# Altium PCB P10_ATMEGA328P.PcbDoc
Units mm, origin at the board's own origin, x right, y up, seen from the top; angles counter-clockwise.
Board outline 90.17 x 41.15 mm, 2 copper layers (Top Layer, Bottom Layer); 54 components, 46 nets, 163 pads, 38 vias.
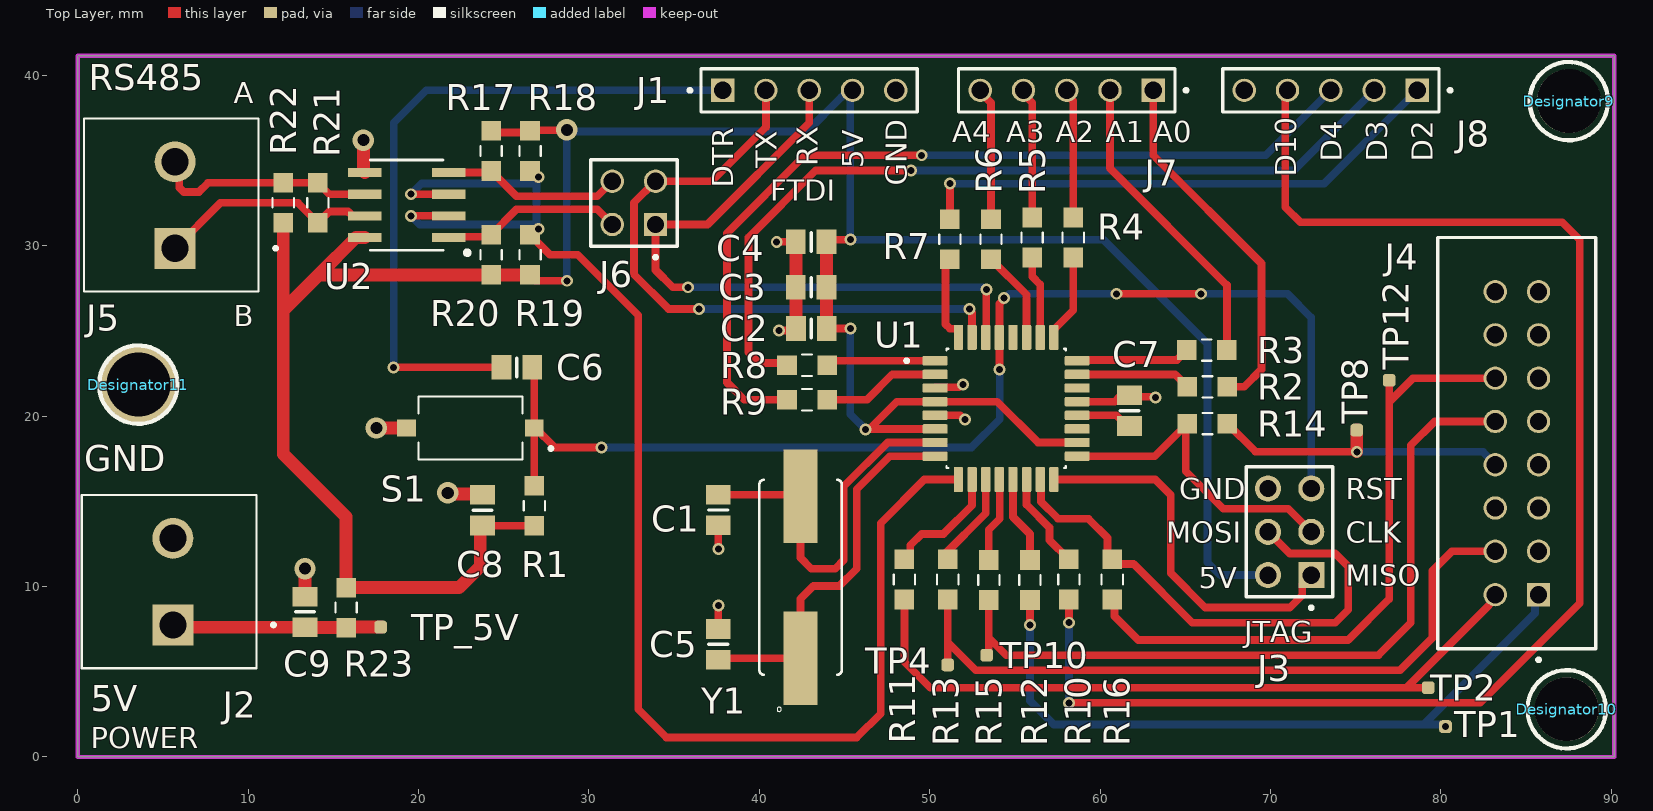
[diagram p0: Top Layer view]
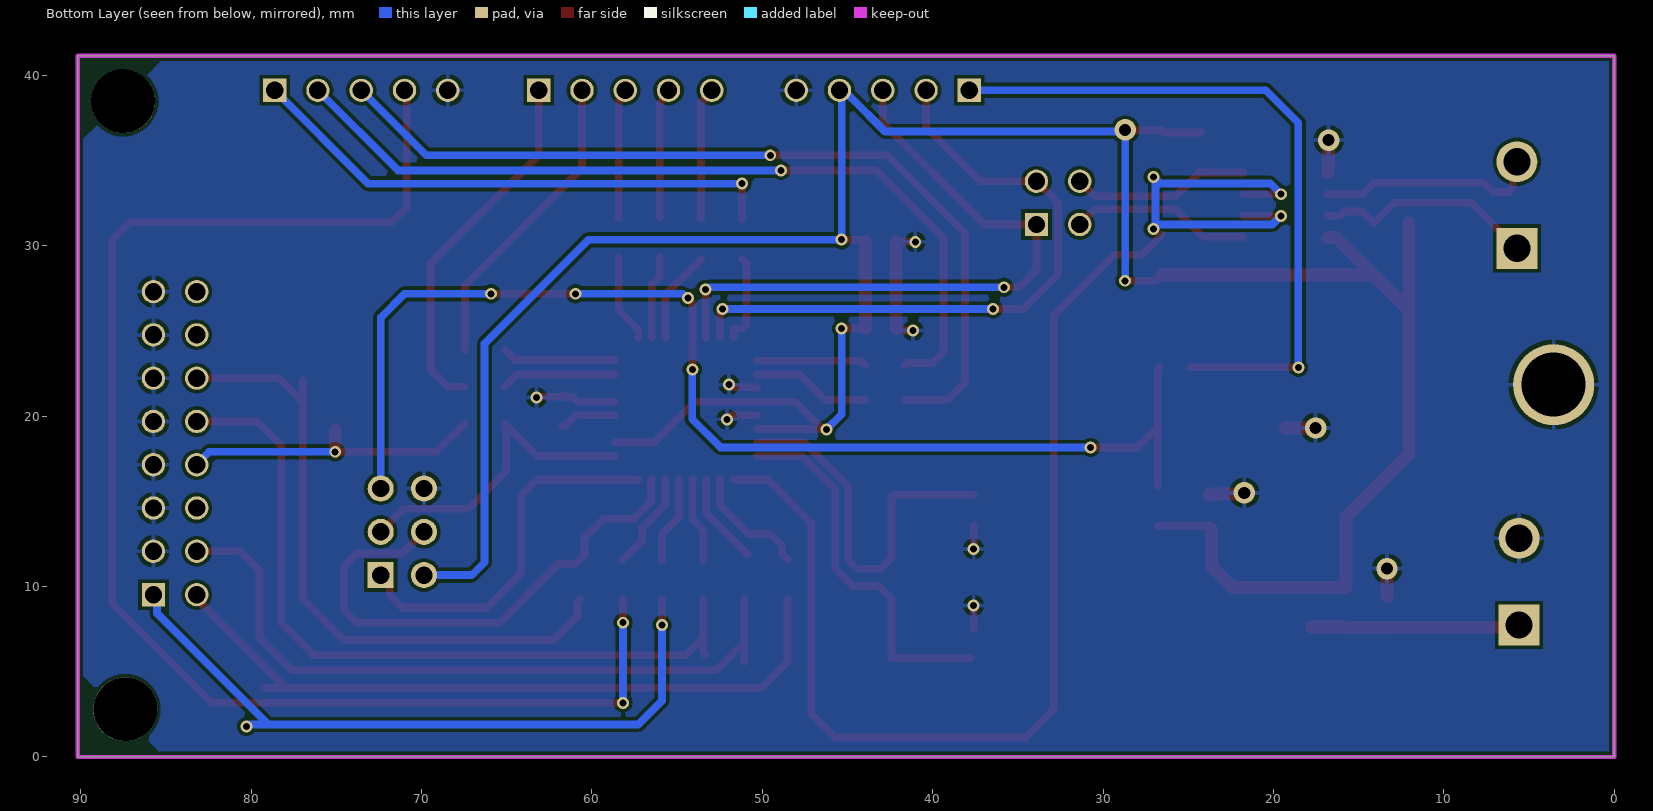
[diagram p1: Bottom Layer view, seen from below]
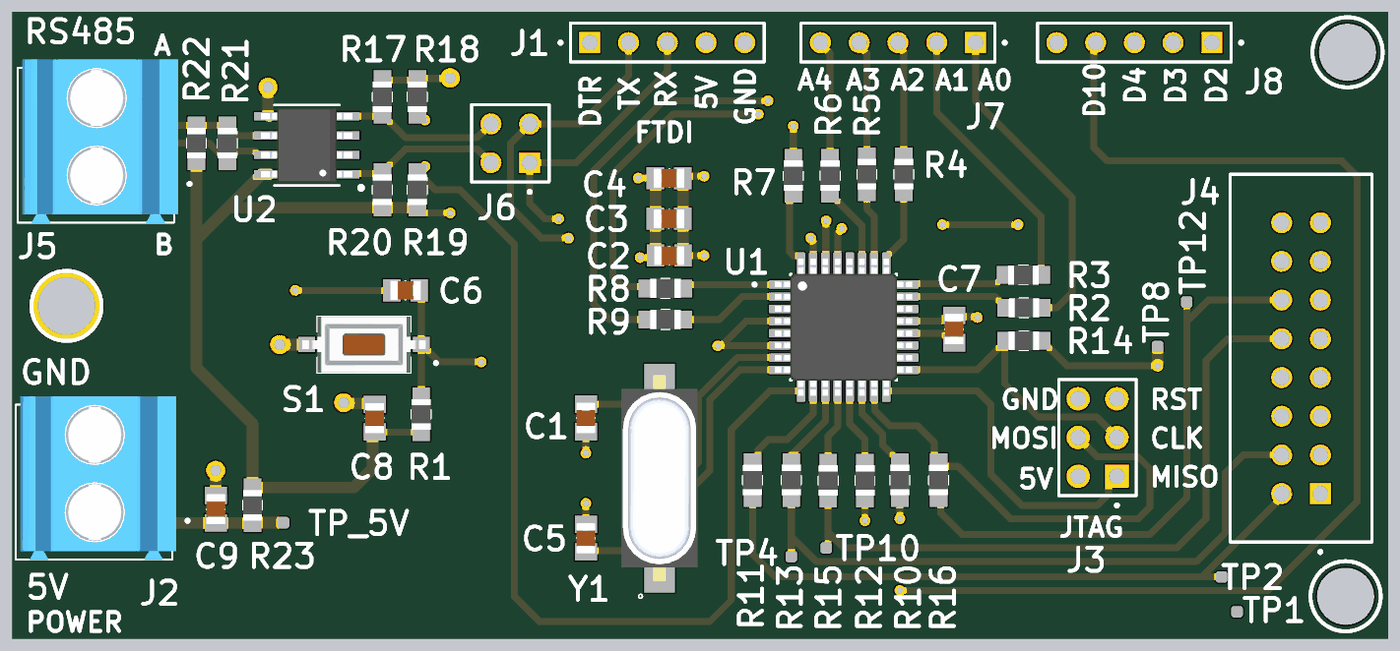
[diagram p2: 3D render of the assembled board from above, using the file's embedded part models]

## Layer stack, top to bottom
Top Solder: solder mask 0.0102, Solder Resist, Dk 3.5
Top Layer: signal copper 0.0356
Dielectric 1: dielectric 0.32, FR-4, Dk 4.8
Bottom Layer: signal copper 0.0356
Bottom Solder: solder mask 0.0102, Solder Resist, Dk 3.5

## Board outline
0,0 0,41.148 90.17,41.148 90.17,0

## Design rules (kind name [scope] priority, off if disabled: settings)
Clearance [All] p1: gap=0.2 ignorepadtopadclearanceinfootprint=FALSE
HoleSize [All] p1: absolutevalues=TRUE maxlimit=4.54 minlimit=0.25 maxpercent=80.000 minpercent=20.000
MinimumSolderMaskSliver [All] p1: minsoldermaskwidth=0.042
PlaneConnect [All] p1: planeconnectstyle=Relief reliefexpansion=0.508 reliefentries=4 reliefconductorwidth=0.354 reliefairgap=0.254
PolygonConnect [All] p1: connectstyle=Relief reliefconductorwidth=0.254 reliefentries=4 polygonreliefangle="90 Angle" airgapwidth=0.254
RoutingVias [All] p1: holewidth=0.411 width=0.8 viastyle="Through Hole" minholewidth=0.311 minwidth=0.6 maxholewidth=3.711 maxwidth=5.27
SilkToSolderMaskClearance [IsPad] p1: minsilkscreentomaskgap=0 clearancetoexposedcopper=TRUE
SolderMaskExpansion [All] p1: expansion=0.102 istentingtop=FALSE
SupplyNets "Schematic Supply Nets_1" [InNet('+5')] p1: voltage=0.000
SupplyNets "Schematic Supply Nets" [InNet('GND')] p2: voltage=0.000
UnpouredPolygon [All] p1: allowshelved=TRUE
Width [All] p1: maxlimit=0.754 minlimit=0.3 preferedwidth=0.454
25 further rules are at their usual default settings.

## Classes and differential pairs
component class P10_ATMEGA328P1: J4 J5 J6 R11 R12 R13 R14 R15 R16 R17 R18 R19 R20 R21 R22 U2
component class P10_ATMEGA328P: C1 C2 C3 C4 C5 C6 C7 C8 C9 J1 J2 J3 J7 J8 R1 R2 R3 R4 R5 R6 R7 R8 R9 R10 S1 U1 Y1

## Components (designator, comment, footprint, x,y, rotation, side; value= is the part's Value field where it differs from the comment)
C1 "CAP CER 22pF/50V 5% 0805" "CAP CER 0.1uF/50V 5%" 37.592,14.489 r90 top
C2 "CAP CER 0.1uF/50V 5% 0805" "CAP CER 0.1uF/50V 5%" 43.053,25.146 r0 top
C3 "CAP CER 0.1uF/50V 5% 0805" "CAP CER 0.1uF/50V 5%" 43.042,27.559 r0 top
C4 "CAP CER 0.1uF/50V 5% 0805" "CAP CER 0.1uF/50V 5%" 43.042,30.226 r0 top
C5 "CAP CER 22pF/50V 5% 0805" "CAP CER 0.1uF/50V 5%" 37.592,6.604 r270 top
C6 "CAP CER 0.1uF/50V 5% 0805" "CAP CER 0.1uF/50V 5%" 25.77,22.86 r180 top
C7 "CAP CER 0.1uF/50V 5% 0805" "CAP CER 0.1uF/50V 5%" 61.722,20.32 r270 top
C8 "CAP CER 0.1uF/50V 5% 0805" "CAP CER 0.1uF/50V 5%" 23.749,14.478 r270 top
C9 "CAP CER 10uF/50V 5% 0805" "CAP CER 0.1uF/50V 5%" 13.335,8.509 r270 top
Designator9 "Comment" "ScrewHole_3.75mmD - duplicate"#1 87.503,38.481 r0 top
Designator10 "Comment" "ScrewHole_3.75mmD - duplicate"#1 87.376,2.794 r0 top
Designator11 "Comment" "ScrewHole_3.75mmD - duplicate"#2 3.556,21.844 r0 top
J1 "BURGE 5 PIN 2.54mm" "BURGE 5 PIN" 42.926,39.116 r180 top
J2 "2 PIN Terminal Block Connector 5.08 mm" "2 PIN Terminal Block Connector 5.08 mm" 5.588,7.747 r90 top
J3 "BURGE 6 PIN 3X2" "BURGE 6 PIN 3X2" 71.12,13.208 r90 top
J4 "BOX HEADER MALE 8X2 2.54mm" "BOX HEADER MALE 8X2 2.54mm" 85.725,9.525 r90 top
J5 "2 PIN Terminal Block Connector 5.08 mm" "2 PIN Terminal Block Connector 5.08 mm" 5.715,29.845 r90 top
J6 "BURGE 2X2 PIN" "BURGE 2X2 pin" 33.909,31.242 r90 top
J7 "BURGE 5 PIN 2.54mm" "BURGE 5 PIN" 58.039,39.116 r0 top
J8 "BURGE 5 PIN 2.54mm" "BURGE 5 PIN" 73.533,39.116 r0 top
R1 "RES 0805 10K/0.25W 5%" "RES 0805 10K/0.25W 5%" 26.797,14.732 r90 top
R2 "RES 0805 0E/0.25W 5%" "RES 0805 10K/0.25W 5%" 66.294,21.717 r0 top
R3 "RES 0805 0E/0.25W 5%" "RES 0805 10K/0.25W 5%" 66.262,23.876 r0 top
R4 "RES 0805 0E/0.25W 5%" "RES 0805 10K/0.25W 5%" 58.42,30.48 r90 top
R5 "RES 0805 0E/0.25W 5%" "RES 0805 10K/0.25W 5%" 56.007,30.48 r90 top
R6 "RES 0805 0E/0.25W 5%" "RES 0805 10K/0.25W 5%" 53.594,30.385 r90 top
R7 "RES 0805 0E/0.25W 5%" "RES 0805 10K/0.25W 5%" 51.181,30.385 r90 top
R8 "RES 0805 0E/0.25W 5%" "RES 0805 10K/0.25W 5%" 42.799,22.987 r180 top
R9 "RES 0805 0E/0.25W 5%" "RES 0805 10K/0.25W 5%" 42.799,20.955 r180 top
R10 "RES 0805 0E/0.25W 5%" "RES 0805 10K/0.25W 5%" 58.166,10.414 r270 top
R11 "RES 0805 0E/0.25W 5%" "RES 0805 10K/0.25W 5%" 48.514,10.414 r90 top
R12 "RES 0805 0E/0.25W 5%" "RES 0805 10K/0.25W 5%" 55.88,10.382 r270 top
R13 "RES 0805 0E/0.25W 5%" "RES 0805 10K/0.25W 5%" 51.054,10.414 r90 top
R14 "RES 0805 0E/0.25W 5%" "RES 0805 10K/0.25W 5%" 66.294,19.558 r180 top
R15 "RES 0805 0E/0.25W 5%" "RES 0805 10K/0.25W 5%" 53.467,10.382 r90 top
R16 "RES 0805 0E/0.25W 5%" "RES 0805 10K/0.25W 5%" 60.706,10.414 r90 top
R17 "RES 0805 10K/0.25W 5%" "RES 0805 10K/0.25W 5%" 24.257,35.56 r90 top
R18 "RES 0805 10K/0.25W 5%" "RES 0805 10K/0.25W 5%" 26.543,35.56 r90 top
R19 "RES 0805 10K/0.25W 5%" "RES 0805 10K/0.25W 5%" 26.543,29.464 r270 top
R20 "RES 0805 10K/0.25W 5%" "RES 0805 10K/0.25W 5%" 24.257,29.464 r270 top
R21 "RES 0805 120E/0.25W 5%" "RES 0805 10K/0.25W 5%" 14.097,32.512 r90 top
R22 "RES 0805 20K/0.25W 5%" "RES 0805 10K/0.25W 5%" 12.065,32.512 r90 top
R23 "RES 0805 10K/0.25W 5%" "RES 0805 10K/0.25W 5%" 15.748,8.763 r270 top (schematic designator R1)
S1 "PUSHBUTTON_SMD_6.1 x 3.7 mm, 2.5 mm" "PUSHBUTTON_SMD_6.1 x 3.7 mm, 2.5 mm" 23.047,19.304 r180 top
TP1 "Comment" "Touch Points 1mm" 80.264,1.778 r0 top
TP2 "Comment" "Touch Points 1mm" 79.248,4.064 r0 top
TP4 "Comment" "Touch Points 1mm" 51.054,5.397 r0 top
TP8 "Comment" "Touch Points 1mm" 75.057,19.177 r0 top
TP10 "Comment" "Touch Points 1mm" 53.34,5.969 r0 top
TP12 "Comment" "Touch Points 1mm" 76.962,22.098 r0 top
TP_5V "Comment" "Touch Points 1mm" 17.78,7.62 r0 top
U1 "ATMEGA328P-AU TQFP-32" "ATMEGA328P-AU IC" 54.483,20.447 r0 top
U2 "MAX485CSA SOIC-8" MAX485CSA 19.304,32.385 r180 top
Y1 "Crystal 16 Mhz SMD 2 pin" "Crystal 16 Mhz SMD 2 pin" 42.418,10.541 r90 top

## Footprints (in the part's own frame and the unit in brackets; to place one, negate y for a bottom-side part, rotate by r counter-clockwise, add the part's x,y. Pads: shape width x height; smd on the part's side, far side on the other; paste and mask are expansions set on the pad)
"2 PIN Terminal Block Connector 5.08 mm" [mm]
  rect 2.4x2.4 / inner round 2.4 / far side rect 2.4x2.4 hole 1.6: 1(0,0)
  round 2.4 hole 1.6: 2(5.08,0)
  silkscreen extent -2.54,-6 7.62,5.35, body extent -2.59,-5.17 8.17,5.08, height 14
"ATMEGA328P-AU IC" [mm] "AVR ATMEGA328P-AU IC 8-Bit 20MHz 32KB (16K x 16) FLASH 32-TQFP (7x7)"
  rrect25% 1.47x0.55 smd: 1(-4.17,2.8) 2(-4.17,2) 3(-4.17,1.2) 4(-4.17,0.4) 5(-4.17,-0.4) 6(-4.17,-1.2) 7(-4.17,-2) 8(-4.17,-2.8) 17(4.17,-2.8) 18(4.17,-2) 19(4.17,-1.2) 20(4.17,-0.4) 21(4.17,0.4) 22(4.17,1.2) 23(4.17,2) 24(4.17,2.8)
  rrect25% 0.55x1.47 smd: 9(-2.8,-4.17) 10(-2,-4.17) 11(-1.2,-4.17) 12(-0.4,-4.17) 13(0.4,-4.17) 14(1.2,-4.17) 15(2,-4.17) 16(2.8,-4.17) 25(2.8,4.17) 26(2,4.17) 27(1.2,4.17) 28(0.4,4.17) 29(-0.4,4.17) 30(-1.2,4.17) 31(-2,4.17) 32(-2.8,4.17)
  silkscreen extent -5.94,-3.5 3.5,3.5, body extent -4.5,-4.5 4.5,4.5, height 1.2
"BOX HEADER MALE 8X2 2.54mm" [mm] "BOX HEADER MALE 8X2 2.54mm 16 pin"
  rect 1.37x1.37 hole 1.02: 01(0,0)
  round 1.37 hole 1.02: 02(0,2.54) 03(2.54,0) 04(2.54,2.54) 05(5.08,0) 06(5.08,2.54) 07(7.62,0) 08(7.62,2.54) 09(10.16,0) 10(10.16,2.54) 11(12.7,0) 12(12.7,2.54) 13(15.24,0) 14(15.24,2.54) 15(17.78,0) 16(17.78,2.54)
  silkscreen extent -3.92,-3.36 20.95,5.9
"BURGE 2X2 pin" [mm] "Connector Header Through Hole 4 position 0.100 (2.54mm), 4X2 PIN"
  rect 1.37x1.37 hole 1.02: 01(0,0)
  round 1.37 hole 1.02: 02(0,2.54) 03(2.54,0) 04(2.54,2.54)
  silkscreen extent -2.02,-1.27 3.81,3.81
"BURGE 5 PIN" [mm] "MTSW-105-07-T-S-048 BURGE 5 PIN 2.54mm"
  rect 1.37x1.37 hole 1.02: 01(5.08,0)
  round 1.37 hole 1.02: 02(2.54,0) 03(0,0) 04(-2.54,0) 05(-5.08,0)
  silkscreen extent -6.35,-1.27 7.1,1.27
"BURGE 6 PIN 3X2" [mm] "MTSW-103-X-X-D-X BURGE 6 PIN 3X2 2.54MM"
  rect 1.53x1.53 / inner round 1.53 / far side rect 1.53x1.53 hole 1.02: 01(-2.54,-1.27)
  round 1.53 hole 1.02: 02(-2.54,1.27) 03(0,-1.27) 04(0,1.27) 05(2.54,-1.27) 06(2.54,1.27)
  silkscreen extent -4.56,-2.54 3.81,2.54
"CAP CER 0.1uF/50V 5%" [mm]
  rect 1.15x1.45 smd: 1(-0.9,0) 2(0.9,0)
  silkscreen extent 0,-0.55 0,0.55, body extent -1,-0.63 1,0.63, height 1.35
"Crystal 16 Mhz SMD 2 pin" [mm] "16 MHz Â±30ppm Crystal 20pF 60 Ohms HC-49/US FOXSDLF/128-20"
  rect 5.5x2 smd: 1(-4.75,0) 2(4.75,0)
  silkscreen extent -7.88,-2.41 5.71,2.41, body extent -6.75,-2.5 6.75,2.5, height 4.5
MAX485CSA [mil] "MAX485CSA-RS-485/RS-422 Transceivers, SOIC-8"
  rect 78x21 smd: 1(-97,75) 2(-97,25) 3(-97,-25) 4(-97,-75) 5(97,-75) 6(97,-25) 7(97,25) 8(97,75)
  silkscreen extent -145,-104 84,115, body extent -118,-96 118,96, height 69
"PUSHBUTTON_SMD_6.1 x 3.7 mm, 2.5 mm" [mm] "6.1 x 3.7 mm, 2.5 mm Actuator Height, 260 gf, Red, Surface Mount, SPST, Tactile Switch, TS09-63-25-R-260-SMT-TR"
  rect 1.1x1 smd: 1(-3.75,0) 2(3.75,0)
  silkscreen extent -4.82,-1.85 3.05,1.85, body extent -4.05,-1.85 4.05,1.85, height 2.5
"RES 0805 10K/0.25W 5%" [mm] "RESISTOR, THICK FILM, 10K, 5%, 0805, FRESISTOR, THICK FILM, 10K, 5%, 0805, FULL REEL Product Range:PANASONIC - ERJ Series"
  rect 1.15x1.15 smd: 1(-1.175,0) 2(1.175,0)
  silkscreen extent -0.28,-0.63 0.28,0.63, body extent -1,-0.63 1,0.63, height 0.7
"ScrewHole_3.75mmD - duplicate"#1 [mm] "SCREW HEAD DIA 4.5MM, SREW LEG DIA 3 MM"
  round 3.75 hole 3.75 unplated: 1(0,0)
  silkscreen extent -2.3,-2.3 2.3,2.3
"ScrewHole_3.75mmD - duplicate"#2 [mm] "SCREW HEAD DIA 4.5MM, SREW LEG DIA 3 MM"
  round 4.75 hole 3.75: 1(0,0)
  silkscreen extent -2.3,-2.3 2.3,2.3
"Touch Points 1mm" [mm] "Touch Points 0.75mm to1mm"
  rrect50% 0.75x0.75 smd: 1(0,0)

## Part data
C1: library part "CAP CER 0.1uF/50V 5%", "CAP CER 22pF/50V 5% Ceramic Capacitor X7R 0805 (2012 Metric)", Package="0805 Samsung", Check_prices=https://www.snapeda.com/parts/CL21B104KCFNNNE/Samsung+Electro-Mechanics/view-part/?ref=eda, Digi-Key_Part_Number=1276-6840-2-ND, MF=Samsung, MP=CL21B104KCFNNNE, Purchase-URL=https://pricing.snapeda.com/search?q=CL21B104KCFNNNE&ref=eda, SnapEDA_Link=https://www.snapeda.com/parts/CL21B104KCFNNNE/Samsung+Electro-Mechanics/view-part/?ref=snap
C2 C3 C4 C6 C7 C8 C9: library part "CAP CER 0.1uF/50V 5%", "CAP CER 0.1uF/50V  Ceramic Capacitor X7R 0805 (2012 Metric)", Package="0805 Samsung", Check_prices=https://www.snapeda.com/parts/CL21B104KCFNNNE/Samsung+Electro-Mechanics/view-part/?ref=eda, Digi-Key_Part_Number=1276-6840-2-ND, MF=Samsung, MP=CL21B104KCFNNNE, Purchase-URL=https://pricing.snapeda.com/search?q=CL21B104KCFNNNE&ref=eda, SnapEDA_Link=https://www.snapeda.com/parts/CL21B104KCFNNNE/Samsung+Electro-Mechanics/view-part/?ref=snap
C5: library part "CAP CER 0.1uF/50V 5%", "CAP CER 22pF/50V 5%  Ceramic Capacitor X7R 0805 (2012 Metric)", Package="0805 Samsung", Check_prices=https://www.snapeda.com/parts/CL21B104KCFNNNE/Samsung+Electro-Mechanics/view-part/?ref=eda, Digi-Key_Part_Number=1276-6840-2-ND, MF=Samsung, MP=CL21B104KCFNNNE, Purchase-URL=https://pricing.snapeda.com/search?q=CL21B104KCFNNNE&ref=eda, SnapEDA_Link=https://www.snapeda.com/parts/CL21B104KCFNNNE/Samsung+Electro-Mechanics/view-part/?ref=snap
J1 J7 J8: library part "BURGE 5 PIN", "MTSW-105-07-T-S-048 BURGE 5 PIN 2.54mm", Package=None, Availability=Unavailable, MP=MTSW-105-07-T-S-048, Price=None
J2 J5: "MOLEX,Screw Type, Horizontal, 5.08 Pitch, 24~12 (AWG), Terminal Block Connector, TB007-508-02BE", Package=None, Check_prices=https://www.snapeda.com/parts/TB007-508-02BE/Same+Sky/view-part/?ref=eda, MF="Same Sky", MP=TB007-508-02BE, SnapEDA_Link=https://www.snapeda.com/parts/TB007-508-02BE/Same+Sky/view-part/?ref=snap
J3: "MTSW-103-X-X-D-X BURGE 6 PIN 3X2 2.54MM", Package=None, Availability=Unavailable, MF="{'manufacturer': u'Samtec Inc.'}", MP=MTSW-103-X-X-D-X, Price=None
J4: "BOX HEADER MALE 8X2 2.54mm 16 pin", Package=None, Availability=Unavailable, MP=TSS-108-01-T-D, Price=None
J6: library part "4PIN BURGE", "Connector Header Through Hole 4 position 0.100 (2.54mm), 2X2 PIN", Package=None, Check_prices=https://www.snapeda.com/parts/MTLW-102-05-G-D-180/Samtec/view-part/?ref=eda, MF=Samtec, MP=MTLW-102-05-G-D-180, SnapEDA_Link=https://www.snapeda.com/parts/MTLW-102-05-G-D-180/Samtec/view-part/?ref=snap
R1 R17 R18 R19 R20 R23: "RESISTOR, THICK FILM, 10K, 5%, 0805, FRESISTOR, THICK FILM, 10K, 5%, 0805, FULL REEL Product Range:PANASONIC - ERJ Series", Package="805-2 Panasonic", Availability="In Stock", Check_prices=https://www.snapeda.com/parts/ERJ-6GEYJ103V/Panasonic+Electronic+Components/view-part/?ref=eda, MF="Panasonic Electronic", MP=ERJ-6GEYJ103V, Price=None, Purchase-URL=https://pricing.snapeda.com/search/part/ERJ-6GEYJ103V/?ref=eda, SnapEDA_Link=https://www.snapeda.com/parts/ERJ-6GEYJ103V/Panasonic+Electronic+Components/view-part/?ref=snap
R2 R3 R4 R5 R6 R7 R8 R9 R10 R11 R12 R13 R14 R15 R16 R21 R22: library part "RES 0805 10K/0.25W 5%", "RESISTOR, THICK FILM, 10K, 5%, 0805, FRESISTOR, THICK FILM, 10K, 5%, 0805, FULL REEL Product Range:PANASONIC - ERJ Series", Package="805-2 Panasonic", Availability="In Stock", Check_prices=https://www.snapeda.com/parts/ERJ-6GEYJ103V/Panasonic+Electronic+Components/view-part/?ref=eda, MF="Panasonic Electronic", MP=ERJ-6GEYJ103V, Price=None, Purchase-URL=https://pricing.snapeda.com/search/part/ERJ-6GEYJ103V/?ref=eda, SnapEDA_Link=https://www.snapeda.com/parts/ERJ-6GEYJ103V/Panasonic+Electronic+Components/view-part/?ref=snap
S1: "6.1 x 3.7 mm, 2.5 mm Actuator Height, 260 gf, Red, Surface Mount, SPST, Tactile Switch, TS09-63-25-R-260-SMT-TR", Package=None, Check_prices=https://www.snapeda.com/parts/TS09-63-25-R-260-SMT-TR/Same+Sky/view-part/?ref=eda, MF="Same Sky", MP=TS09-63-25-R-260-SMT-TR, SnapEDA_Link=https://www.snapeda.com/parts/TS09-63-25-R-260-SMT-TR/Same+Sky/view-part/?ref=snap
U1: library part ATMEGA328P-AU, "AVR ATMEGA328P-AU IC 8-Bit 20MHz 32KB (16K x 16) FLASH 32-TQFP (7x7)", Package="TQFP-32 Microchip", Check_prices=https://www.snapeda.com/parts/ATMEGA328P-AU/Microchip/view-part/?ref=eda, MF=Microchip, MP=ATMEGA328P-AU, SnapEDA_Link=https://www.snapeda.com/parts/ATMEGA328P-AU/Microchip/view-part/?ref=snap
U2: library part MAX485CSA, "MAX485CSA-RS-485/RS-422 Transceivers, SOIC-8", Package="SOIC-8 Maxim", Check_prices=https://www.snapeda.com/parts/MAX485CSA+/Analog+Devices/view-part/?ref=eda, MF="Analog Devices", MP=MAX485CSA+, SnapEDA_Link=https://www.snapeda.com/parts/MAX485CSA+/Analog+Devices/view-part/?ref=snap
Y1: "16 MHz Â±30ppm Crystal 20pF 60 Ohms HC-49/US FOXSDLF/128-20", Package="HC49SD Fox Electronics", Check_prices=https://www.snapeda.com/parts/FOXSDLF/128-20/Fox+Electronics/view-part/?ref=eda, MF="Fox Electronics", MP=FOXSDLF/128-20, SnapEDA_Link=https://www.snapeda.com/parts/FOXSDLF/128-20/Fox+Electronics/view-part/?ref=snap

## Via types
v1: diameter 0.7, hole 0.411, Top Layer to Bottom Layer, 33 vias
v2: diameter 1.25, hole 0.711, Top Layer to Bottom Layer, 4 vias
v3: diameter 1.27, hole 0.711, Top Layer to Bottom Layer, 1 vias

## Nets (pads, with @x,y where several pads share a name; then routed paths per layer and width w, separated by ;. In a path a pad name is that pad's centre, name@x,y a point inside that pad or via, vN(x,y) a via of type N, cw(c..) or ccw(c..) an arc to the next point about the centre after c; other vN are vias at no path point)
+5: C2.2 C3.2 C4.2 C8.2 J1.04 J3.02 R1.1 R17.2 R18.2 R19.2 R20.2 R22.1 R23.1 U1.4 U1.6 U1.18 U2.8 | length 170
  Top Layer w0.454: C8.2 23.759,13.568 26.786,13.568 R1.1 ; R17.2@24.257,36.64 R18.2@26.416,36.64 ; R19.2 26.891,27.941 27.156,27.941 27.157,27.94 v1(28.702,27.94) ; R18.2 26.575,36.767 28.67,36.767 v3(28.702,36.798) ; C4.2 44.069,30.353 v1(45.339,30.353) ; C2.2 v1(45.339,25.146) ; v1(46.228,19.224) 46.251,19.247 v1@46.472,19.247 ; U1.6 v1@46.472,19.247 ; U1.18 56.356,18.447 53.956,20.847 U1.4 48.072,20.847 v1@46.472,19.247
  Top Layer w0.754: R22.1 12.065,26.208 ; U2.8 16.337,30.48 14.146,28.289 ; C8.2@23.622,13.335 23.622,11.176 22.384,9.938 R23.1 15.748,14.097 12.065,17.78 12.065,26.208 ; R19.2 R20.2 14.146,28.289 ; C4.2 43.948,30.22 43.948,27.559 43.948,25.151 C2.2 ; 12.065,26.208 14.146,28.289
  Bottom Layer w0.454: v1(28.702,27.94) 28.702,36.576 28.575,36.703 42.799,36.703 44.827,38.731 44.833,38.731 45.218,39.116 J1.04 45.339,38.989 v1(45.339,30.353) 60.198,30.353 66.294,24.257 66.294,11.43 67.056,10.668 J3.02 ; v1(45.339,25.146) 45.339,20.114 v1(46.228,19.224)
+5V: C9.2 J2.1 R23.2 TP_5V.1 | length 12.3
  Top Layer w0.754: J2.1 5.726,7.609 C9.2 13.345,7.599 15.737,7.599 R23.2 15.78,7.62 TP_5V.1
A0/PC0: R2.1 U1.23 | length 6.8
  Top Layer w0.454: U1.23 64.389,22.447 R2.1
A1/PC1: R3.1 U1.24 | length 6.7
  Top Layer w0.454: U1.24 58.701,23.295 64.506,23.295 R3.1
A2/PC2: R4.1 U1.25 | length 5.2
  Top Layer w0.454: U1.25 57.283,25.077 58.42,26.214 R4.1
A3/PC3: R5.1 U1.26 | length 4.9
  Top Layer w0.454: R5.1 56.013,29.299 56.013,28.188 56.483,27.718 U1.26
A4/PC4: R6.1 U1.27 | length 5.5
  Top Layer w0.454: R6.1 55.683,27.121 U1.27
A_D6/PD6: R11.2 U1.10 | length 7.1
  Top Layer w0.454: R11.2 48.862,11.937 48.862,12.413 49.53,13.081 50.8,13.081 52.483,14.764 U1.10
B_D7/PD7: R13.2 U1.11 | length 5.4
  Top Layer w0.454: R13.2@50.863,11.874 53.283,14.294 U1.11
CLK_D13/PB5: J3.03 R14.2 U1.17 | length 18.9
  Top Layer w0.454: U1.17 63.208,17.647 R14.2 65.024,19.463 65.024,16.764 67.232,14.556 71.042,14.556 J3.03
D2/PD2: R7.1 U1.32 | length 5.3
  Top Layer w0.454: R7.1 50.927,28.956 50.927,25.391 51.193,25.125 51.635,25.125 51.683,25.077 U1.32
D3/PD3: R8.1 U1.1 | length 6.4
  Top Layer w0.454: R8.1@43.975,22.986 44.237,23.247 U1.1
D4/PD4: R9.1 U1.2 | length 7
  Top Layer w0.454: R9.1 46.317,20.955 47.81,22.447 U1.2
D10/PB2: R10.1 U1.14 | length 5.7
  Top Layer w0.454: U1.14 55.683,14.802 57.023,13.462 57.023,12.732 R10.1
DATA_D11/PB3: J3.04 R16.2 U1.15 | length 31.3
  Top Layer w0.454: U1.15 56.531,16.229 56.531,14.97 57.531,13.97 59.309,13.97 60.434,12.845 60.434,11.861 R16.2 60.978,11.317 61.962,11.317 65.405,7.874 73.787,7.874 74.551,8.638 74.551,11.174 73.787,11.938 71.12,11.938 J3.04
DTR: C6.2 J1.01 | length 40.8
  Top Layer w0.454: v1(18.542,22.86) C6.2
  Bottom Layer w0.454: v1(18.542,22.86) 18.542,37.211 20.447,39.116 J1.01
EN1: R18.1 R19.1 U1.9 U2.2 U2.3 | length 87
  Top Layer w0.454: v1(19.558,31.75) U2.2 ; v1(19.558,33.02) U2.3 ; R19.1 27.718,29.464 29.337,29.464 32.893,25.908 32.893,2.794 34.544,1.143 45.72,1.143 47.117,2.54 47.117,13.716 49.678,16.277 U1.9
  Bottom Layer w0.454: v1(19.558,31.75) 20.066,31.242 26.73,31.242 26.984,30.988 v1(27.051,30.988) 27.051,31.055 26.924,31.182 v1@26.924,34.036 ; v1(19.558,33.02) 20.193,33.655 26.662,33.655 27.043,34.036 v1(27.051,34.036)
EN_D9/PB1: R12.1 U1.13 | length 5.1
  Top Layer w0.454: U1.13 54.883,14.078 55.88,13.081 R12.1
GND: C1.1 C2.1 C3.1 C4.1 C5.1 C7.1 C8.1 C9.1 Designator11.1 J1.05 J2.2 J3.06 J4.03 J4.05 J4.07 J4.09 J4.11 J4.13 J4.15 J8.05 S1.2 U1.3 U1.5 U1.21 U2.5 | length 25.9
  Top Layer w0.454: C5.1 v1(37.592,8.89) ; v1(37.592,12.192) C1.1 ; v1(41.021,30.226) C4.1 ; v1(41.148,25.019) 42.026,25.019 C2.1 ; U1.5 51.768,20.047 52.003,19.812 v1(52.07,19.812) ; U1.3 50.361,21.695 51.727,21.695 51.876,21.844 v1(51.943,21.844) ; U1.21 60.852,20.847 61.131,21.126 C7.1@61.628,21.126 ; C7.1 C7.1@61.628,21.126 ; v1(63.246,21.082) 63.199,21.129 61.631,21.129 C7.1@61.628,21.126
  Top Layer w0.754: C9.1 v2(13.335,11.049) ; v2(16.764,36.195) 16.764,34.366 U2.5 ; v2(17.526,19.304) S1.2 ; v2(21.717,15.494) 21.775,15.436 23.691,15.436 C8.1 ; C4.1 42.148,30.22 42.148,25.151 C2.1
MISO: J3.01 U1.16 | length 22.1
  Top Layer w0.454: U1.16 63.225,16.277 64.135,15.367 64.135,10.795 66.167,8.763 71.12,8.763 71.852,9.495 71.852,10.13 J3.01
NetC7_2: C7.2 U1.20 | length 3.3
  Top Layer w0.454: U1.20 60.945,20.047 61.572,19.42 C7.2
NetJ4_01: J4.01 R12.2 TP1.1 | length 41.3
  Top Layer w0.454: v1(55.88,7.747) R12.2
  Bottom Layer w0.454: v1(55.88,7.747) 55.88,3.302 57.277,1.905 78.994,1.905 ; v1(80.264,1.778) 80.197,1.778 80.07,1.905 78.994,1.905 ; J4.01 85.514,9.314 85.514,8.425 78.994,1.905
NetJ4_02: J4.02 R11.1 TP2.1 | length 42.6
  Top Layer w0.454: R11.1 48.514,5.588 50.038,4.064 77.978,4.064 ; TP2.1 77.978,4.064 ; J4.02 83.185,9.277 82.8,8.892 82.8,8.886 77.978,4.064
NetJ4_04: J4.04 R13.1 TP4.1 | length 41.7
  Top Layer w0.454: TP4.1@51.054,5.588 51.054,6.731 ; R13.1 51.054,6.731 ; J4.04 80.645,12.065 79.502,10.922 79.502,6.985 77.597,5.08 52.705,5.08 51.054,6.731
NetJ4_08: J4.08 R14.1 TP8.1 | length 18
  Top Layer w0.454: R14.1 69.12,17.907 v1(75.057,17.907)
  Top Layer w0.754: v1(75.057,17.907) TP8.1
  Bottom Layer w0.454: v1(75.057,17.907) 82.461,17.907 83.185,17.183 J4.08
NetJ4_10: J4.10 R15.1 TP10.1 | length 45.2
  Top Layer w0.454: TP10.1 53.467,6.096 53.467,6.985 ; R15.1 53.467,6.985 ; J4.10 79.629,19.685 78.232,18.288 78.232,7.874 76.327,5.969 54.483,5.969 53.467,6.985
NetJ4_12: J4.12 R16.1 TP12.1 | length 38.4
  Top Layer w0.454: R16.1 60.839,9.106 60.839,8.249 62.23,6.858 74.549,6.858 76.962,9.271 76.962,20.828 ; TP12.1 76.962,20.828 ; J4.12 78.359,22.225 76.962,20.828
NetJ5_1: J5.1 R21.1 U2.7 | length 13.1
  Top Layer w0.454: J5.1 8.382,32.512 12.922,32.512 R21.1 14.764,32.004 15.862,32.004 16.116,31.75 U2.7
NetJ5_2: J5.2 R21.2 R22.2 U2.6 | length 13.1
  Top Layer w0.454: J5.2 5.955,34.685 5.955,33.413 6.221,33.147 7.112,33.147 7.652,33.687 R22.2 R21.2 14.764,33.02 U2.6
NetJ7_01: J7.01 R2.2 | length 21.4
  Top Layer w0.454: J7.01 63.119,35.306 69.469,28.956 69.469,22.733 68.459,21.723 67.475,21.723 R2.2
NetJ7_02: J7.02 R3.2 | length 18.1
  Top Layer w0.454: J7.02 60.579,34.544 67.437,27.686 R3.2
NetJ7_03: J7.03 R4.2 | length 7.6
  Top Layer w0.454: J7.03 58.039,38.868 58.42,38.487 R4.2
NetJ7_04: J7.04 R5.2 | length 7.7
  Top Layer w0.454: J7.04 55.499,38.9 56.007,38.392 R5.2
NetJ7_05: J7.05 R6.2 | length 7.8
  Top Layer w0.454: J7.05 52.959,39.027 53.594,38.392 R6.2
NetJ8_01: J8.01 R7.2 | length 31.8
  Top Layer w0.454: R7.2 v1(51.181,33.64)
  Bottom Layer w0.454: v1(51.181,33.64) 73.137,33.64 J8.01
NetJ8_02: J8.02 R8.2 | length 49.6
  Top Layer w0.454: R8.2 41.497,23.114 40.005,23.114 39.37,23.749 39.37,30.48 43.307,34.417 v1(48.895,34.417)
  Bottom Layer w0.454: v1(48.895,34.417) 71.374,34.417 J8.02
NetJ8_03: J8.03 R9.2 | length 51.6
  Top Layer w0.454: R9.2 39.116,20.955 38.1,21.971 38.1,30.734 42.672,35.306 v1(49.53,35.306)
  Bottom Layer w0.454: v1(49.53,35.306) 69.723,35.306 J8.03
NetJ8_04: J8.04 R10.2 | length 84.8
  Top Layer w0.454: v1(58.166,3.175) 82.296,3.175 88.138,9.017 88.138,30.353 87.122,31.369 71.755,31.369 70.866,32.258 70.866,38.989 J8.04 ; v1(58.166,7.874) R10.2
  Bottom Layer w0.454: v1(58.166,3.175) v1(58.166,7.874)
R\S\T\\: C6.1 J3.05 R1.2 S1.1 U1.29 | length 71.5
  Top Layer w0.454: C6.1 26.797,22.733 S1.1 ; R1.2 S1.1 ; v1(30.734,18.161) 27.99,18.161 26.847,19.304 S1.1 ; v1(54.102,22.733) 54.093,22.742 54.093,24.607 U1.29 54.093,24.626 54.093,26.594 54.356,26.857 v1(54.356,26.924) ; v1(60.96,27.178) v1(65.913,27.178)
  Bottom Layer w0.454: v1(30.734,18.161) 52.451,18.161 54.102,19.812 v1(54.102,22.733) ; v1(54.356,26.924) 54.423,26.924 54.677,27.178 v1(60.96,27.178) ; v1(65.913,27.178) 70.993,27.178 72.39,25.781 J3.05
RX: J1.03 J6.01 U1.30 | length 38.8
  Top Layer w0.454: v1(35.814,27.559) 34.925,27.559 33.909,28.575 J6.01 36.957,31.242 42.926,37.211 J1.03 ; U1.30 53.311,24.645 53.311,27.403 v1(53.34,27.432)
  Bottom Layer w0.454: v1(35.814,27.559) 53.146,27.559 53.273,27.432 v1(53.34,27.432)
RX1: J6.02 R20.1 U2.1 | length 10.7
  Top Layer w0.454: U2.1 21.808,30.52 24.138,30.52 R20.1 25.749,32.131 30.48,32.131 J6.02
SCLK_D8/PB0: R15.2 U1.12 | length 5
  Top Layer w0.454: R15.2 53.467,13.335 54.102,13.97 54.102,16.258 U1.12
TX: J1.02 J6.03 U1.31 | length 38.2
  Top Layer w0.454: v1(36.449,26.289) 34.671,26.289 32.639,28.321 32.639,32.512 J6.03 37.211,33.782 40.386,36.957 J1.02 ; v1(52.324,26.289) 52.324,26.222 52.483,26.063 U1.31
  Bottom Layer w0.454: v1(36.449,26.289) v1(52.324,26.289)
TX1: J6.04 R17.1 U2.4 | length 10.6
  Top Layer w0.454: U2.4 R17.1@24.257,34.29 ; R17.1 25.749,32.893 30.48,32.893 J6.04
XTAL1: C1.2 U1.7 Y1.2 | length 22.2
  Top Layer w0.454: C1.2 42.32,15.389 Y1.2 42.418,11.684 43.053,11.049 44.45,11.049 44.958,11.557 44.958,15.875 47.53,18.447 U1.7
XTAL2: C5.2 U1.8 Y1.1 | length 22.2
  Top Layer w0.454: C5.2@37.77,5.791 Y1.1 42.418,9.271 43.18,10.033 44.704,10.033 45.72,11.049 45.72,15.712 47.655,17.647 U1.8
pads on no net: Designator9.1 Designator10.1 J4.06 J4.14 J4.16 U1.19 U1.22 U1.28

## Polygon pours and split planes (outlines as drawn)
GND on Bottom Layer "GND_L02_P003" (solid, pour order 3): 0,0 85.09,0 90.17,5.08 90.17,35.941 84.963,41.148 0,41.148
GND on Bottom Layer "NONET_L02_P000" (solid, shelved, pour order 0): 0,0 90.17,0 90.17,41.148 0,41.148

## Keep-outs
Keep-Out Layer:
  the board outline again, w0.25

## Silkscreen, mask and mechanical layers (free items; w line width, h text height)
Top Overlay:
  text "RS485" at 0.635,39.116 h1.52
  text "A" at 9.144,38.354 h1.24
  text "A4" at 51.308,36.068 h1.24
  text "A3" at 54.483,36.068 h1.24
  text "A2" at 57.404,36.068 h1.24
  text "A1" at 60.325,36.068 h1.24
  text "A0" at 63.119,36.068 h1.24
  text "D4" at 74.168,34.925 h1.24 r90
  text "D3" at 76.835,34.925 h1.24 r90
  text "D2" at 79.502,34.925 h1.24 r90
  text "RX" at 43.434,34.671 h1.24 r90
  text "TX" at 41.021,34.544 h1.24 r90
  text "5V" at 46.101,34.544 h1.24 r90
  text "D10" at 71.501,34.036 h1.24 r90
  text "GND" at 48.641,33.528 h1.24 r90
  text "DTR" at 38.481,33.401 h1.24 r90
  text "FTDI" at 40.64,32.639 h1.24
  text "B" at 9.144,25.273 h1.24
  text "GND" at 0.381,16.764 h1.52
  text "GND" at 64.643,15.113 h1.24
  text "RST" at 74.422,15.113 h1.24
  text "MOSI" at 63.881,12.573 h1.24
  text "CLK" at 74.422,12.573 h1.24
  text "MISO" at 74.422,10.033 h1.24
  text "5V" at 65.786,9.906 h1.24
  text "JTAG" at 68.453,6.731 h1.24
  text "5V" at 0.762,2.667 h1.52
  text "POWER" at 0.762,0.508 h1.24